# Altium PCB Connector_Board.PcbDoc
Units mil, origin at the board's own origin, x right, y up, seen from the top; angles counter-clockwise.
Board outline 2000 x 1100 mil, 2 copper layers (Top Layer, Bottom Layer), stack 63.2 mil thick; 6 components, 10 nets, 24 pads, 0 vias.
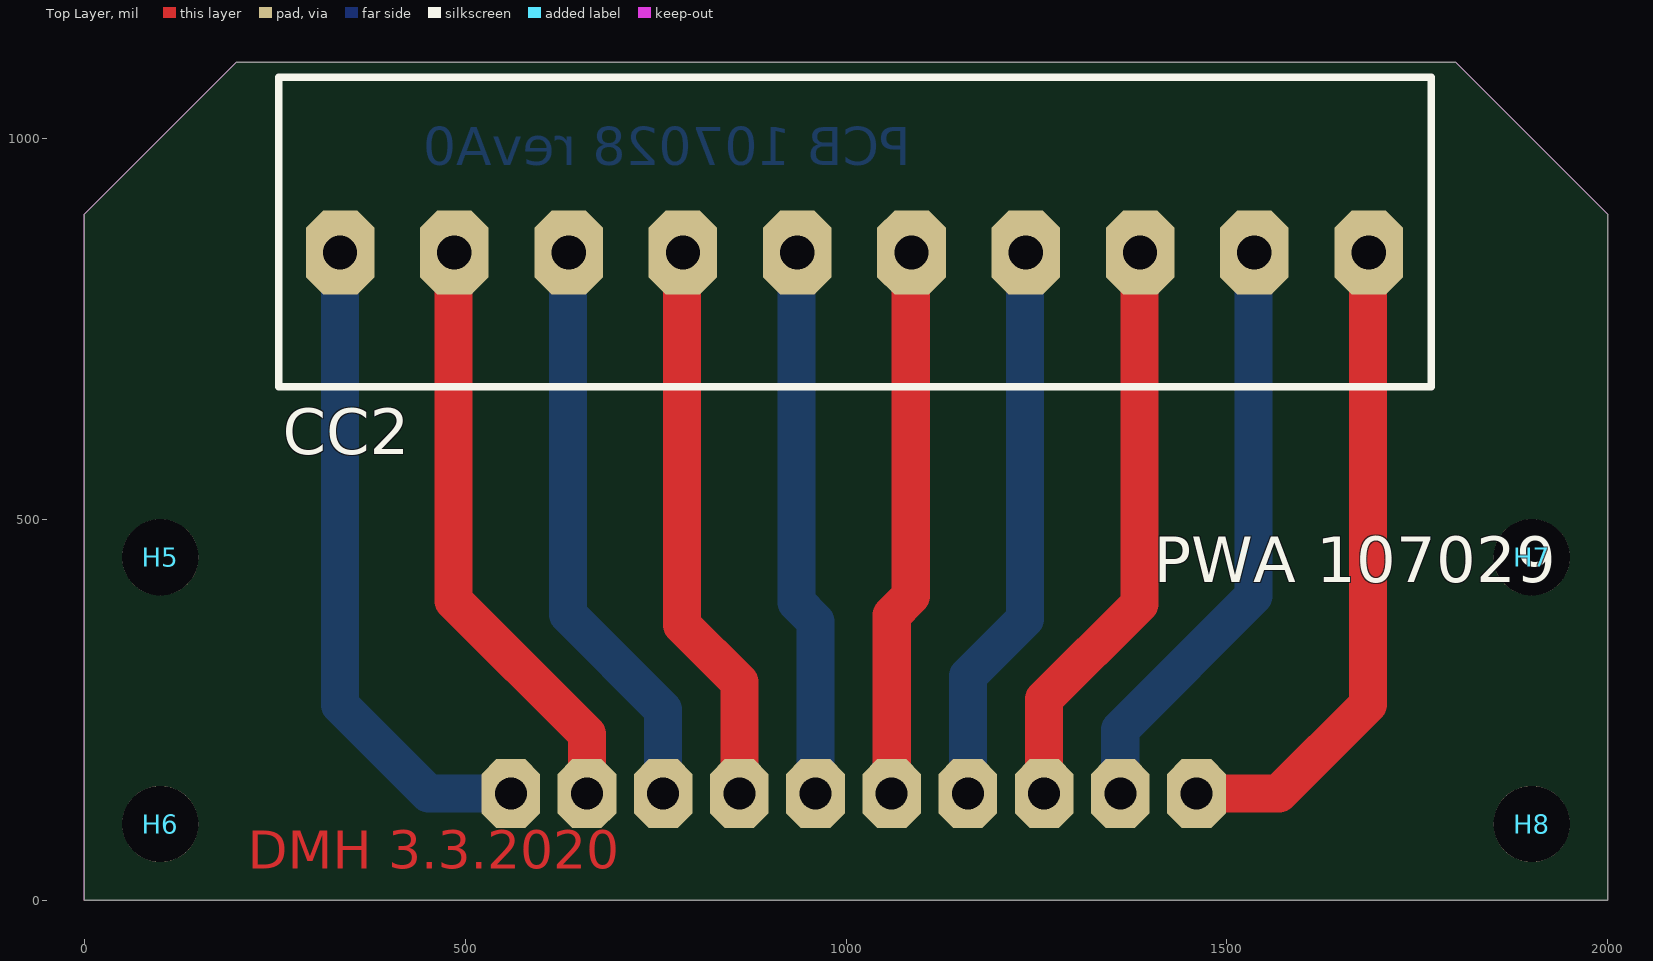
[diagram p0: Top Layer view]
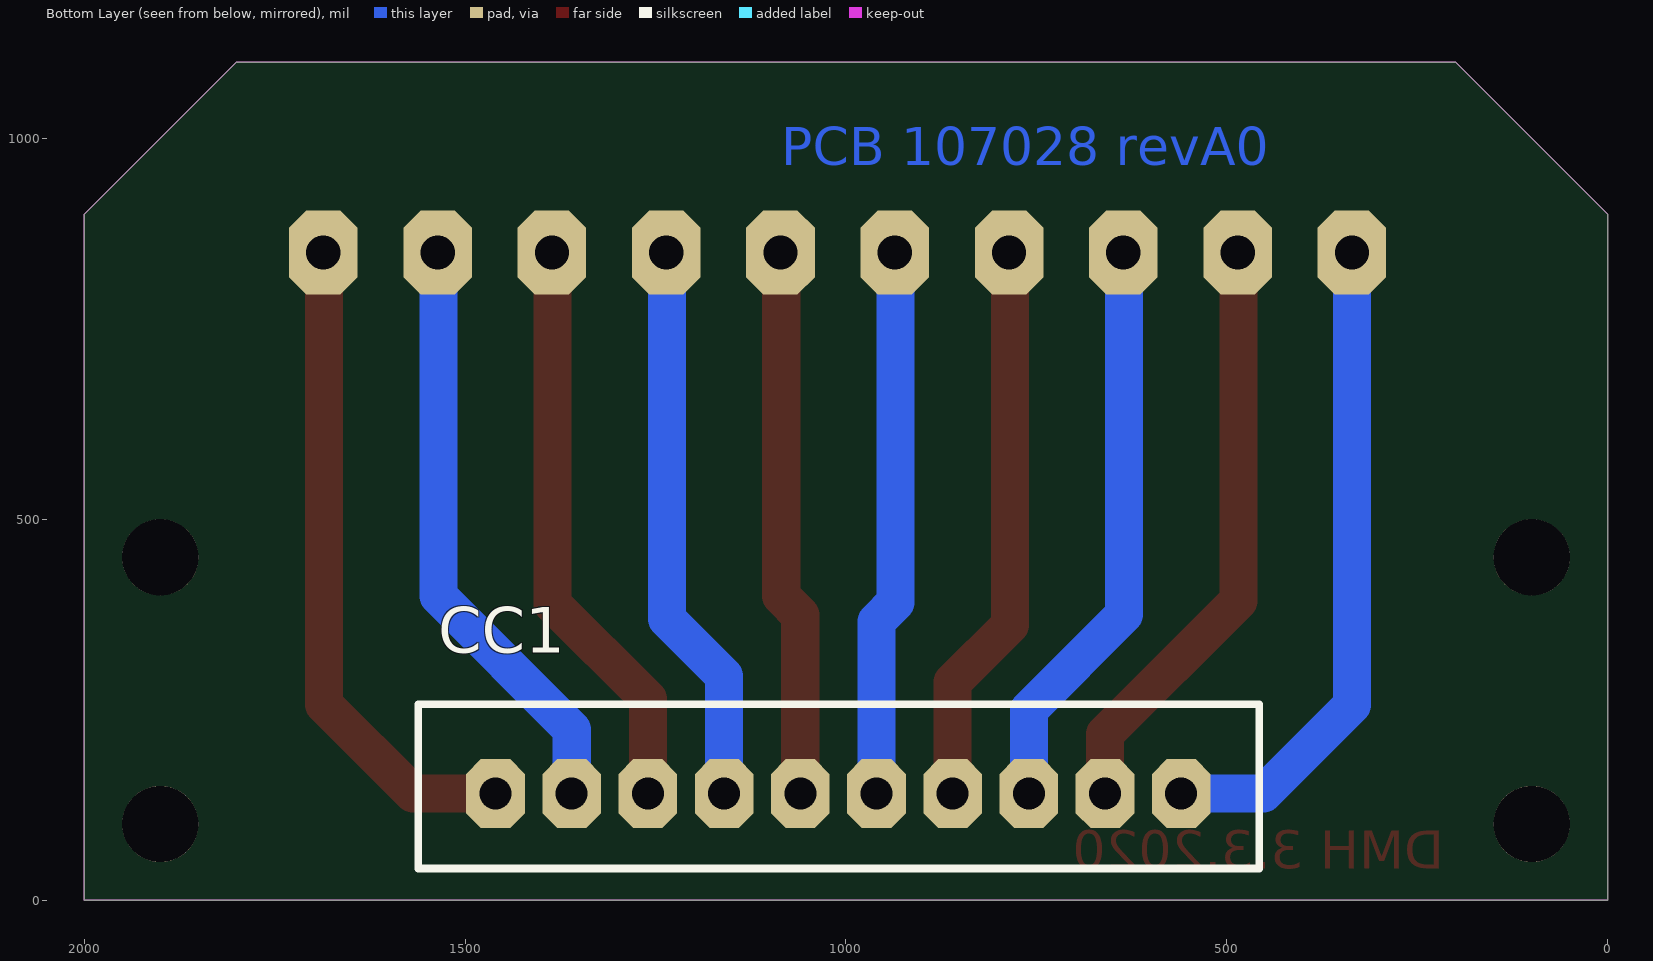
[diagram p1: Bottom Layer view, seen from below]

## Layer stack, top to bottom
Top Solder: solder mask 0.4, Solder Resist, Dk 3.5
Top Layer: signal copper 1.4
Dielectric 1: dielectric 60.4, FR-4, Dk 4.8
Bottom Layer: signal copper 1.4
Bottom Solder: solder mask 0.4, Solder Resist, Dk 3.5

## Board outline
0,0 0,900 200,1100 1800,1100 2000,900 2000,0

## Design rules (kind name [scope] priority, off if disabled: settings)
BoardOutlineClearance [All] p1: gap=12 ignorepadtopadclearanceinfootprint=FALSE
Clearance [All] p1: gap=10 ignorepadtopadclearanceinfootprint=FALSE except(0: Arc-Hole Track-Hole SMDPad-Hole THPad-Hole Via-Hole Fill-Hole Poly-Hole Region-Hole Text-Hole)
PolygonConnect [All] p1: connectstyle=Relief reliefconductorwidth=10 reliefentries=4 polygonreliefangle="90 Angle" airgapwidth=10
RoutingVias [All] p1: holewidth=28 width=50 viastyle="Through Hole" minholewidth=28 minwidth=50 maxholewidth=28 maxwidth=50
SolderMaskExpansion [All] p1: expansion=4 istentingtop=FALSE
Width [All] p1: maxlimit=50 minlimit=10 preferedwidth=20
30 further rules are at their usual default settings.

## Components (designator, comment, footprint, x,y, rotation, side; value= is the part's Value field where it differs from the comment)
CC1 "Molex 70543-0044" "10 PIN MOLEX VERTICAL" 1010,140 r180 bottom
CC2 "Phoenix 1728365" "PHOENIX 1728365" 1011,850 r180 top
H5 "Connector Board Mounting Hole" "Mount Hole Connector Board"#1 100,450 r0 top
H6 "Connector Board Mounting Hole" "Mount Hole Connector Board"#1 100,100 r0 top
H7 "Connector Board Mounting Hole" "Mount Hole Connector Board"#1 1900,450 r0 top
H8 "Connector Board Mounting Hole" "Mount Hole Connector Board"#2 2620,120 r0 top

## Footprints (in the part's own frame and the unit in brackets; to place one, negate y for a bottom-side part, rotate by r counter-clockwise, add the part's x,y. Pads: shape width x height; smd on the part's side, far side on the other; paste and mask are expansions set on the pad)
"10 PIN MOLEX VERTICAL" [mil] "Vertical Molex SL 10 Pin Connector"
  oct 77x90 hole 42: 1(450,0) 2(350,0) 3(250,0) 4(150,0) 5(50,0) 6(-50,0) 7(-150,0) 8(-250,0) 9(-350,0) 10(-450,0)
  silkscreen extent -551,-98 552,117, body extent -550,-97 550,163, height 467
"Mount Hole Connector Board"#1 [mil]
  round 100 hole 100 unplated: 0(0,0)
"Mount Hole Connector Board"#2 [mil]
  round 100 hole 100 unplated: 0(-720,-20)
"PHOENIX 1728365" [mil] "Phoenix PCB Connector, 1 x 10 pins"
  oct 90x110 hole 45: 1(-675,0) 2(-525,0) 3(-375,0) 4(-225,0) 5(-75,0) 6(75,0) 7(225,0) 8(375,0) 9(525,0) 10(675,0)
  silkscreen extent -757,-230 756,176, body extent -750,-224 750,169, height 374

## Part data
CC1: "Molex SL Vertical 1 x 10 header"
CC2: "Phoenix PCB Connector, 1 x 10 pins"

## Nets (pads, with @x,y where several pads share a name; then routed paths per layer and width w, separated by ;. In a path a pad name is that pad's centre, name@x,y a point inside that pad or via, vN(x,y) a via of type N, cw(c..) or ccw(c..) an arc to the next point about the centre after c; other vN are vias at no path point)
NetCC1_1: CC1.1 CC2.10 | length 866
  Bottom Layer w50: CC2.10 336,256 452,140 CC1.1
NetCC1_2: CC1.2 CC2.9 | length 782.5
  Top Layer w50: CC2.9@485,850 485,393 660,218 CC1.2
NetCC1_3: CC1.3 CC2.8 | length 761.8
  Bottom Layer w50: CC2.8@635,850 635,375 760,250 CC1.3
NetCC1_4: CC1.4 CC2.7 | length 741.1
  Top Layer w50: CC2.7@785,850 785,361 860,286 CC1.4
NetCC1_5: CC1.5 CC2.6 | length 720.4
  Bottom Layer w50: CC2.6@935,850 935,391 960,366 CC1.5
NetCC1_6: CC1.6 CC2.5 | length 720.4
  Top Layer w50: CC1.6 1060,374 1085,399 CC2.5@1085,850
NetCC1_7: CC1.7 CC2.4 | length 741.1
  Bottom Layer w50: CC1.7 1160,294 1235,369 CC2.4@1235,850
NetCC1_8: CC1.8 CC2.3 | length 761.8
  Top Layer w50: CC1.8 1260,264 1385,389 CC2.3@1385,850
NetCC1_9: CC1.9 CC2.2 | length 782.5
  Bottom Layer w50: CC1.9 1360,224 1535,399 CC2.2@1535,850
NetCC1_10: CC1.10 CC2.1 | length 866.5
  Top Layer w50: CC1.10 1568,140 1685,257 CC2.1@1685,850
pads on no net: H5.0 H6.0 H7.0 H8.0

## Keep-outs
Keep-Out Layer:
  the board outline again, w0.1

## Other copper
Top Layer:
  text "DMH 3.3.2020" at 215,25.09 h85
Bottom Layer:
  text "PCB 107028 revA0" at 1085,964.31 h50

## Silkscreen, mask and mechanical layers (free items; w line width, h text height)
Top Overlay:
  text "PWA 107029" at 1404.05,417.02 h60
Drill Drawing:
  lines w10: 0,0 2000,0 2000,900 1800,1100 200,1100 0,900 0,0
  lines w12: 2901.02,1774.14 3026.12,1774.14 2963.57,1649.04 2901.02,1774.14 ; 2901.02,1930.52 3026.12,1930.52 3026.12,2055.62 2901.02,2055.62 2901.02,1930.52 ; 2901.02,2243.28 2932.3,2243.28 2963.57,2212 2994.85,2243.28 3026.12,2243.28 2994.85,2274.55 3026.12,2305.83 2994.85,2305.83 2963.57,2337.1 2932.3,2305.83 2901.02,2305.83 2932.3,2274.55 2901.02,2243.28
  lines w15: 2790.93,1564.6 7958.49,1564.6 ; 2790.93,2409.04 7958.49,2409.04 ; 3803.02,1283.12 3803.02,2690.52 ; 4802.56,1283.12 4802.56,2690.52 ; 6946.41,1283.12 6946.41,2690.52 ; 2790.93,1283.12 7958.49,1283.12 7958.49,2690.52 2790.93,2690.52 2790.93,1283.12
  text "Symbol" at 2959.82,2493.48 h135.11
  text "Count" at 3887.46,2493.48 h135.11
  text "Hole Size" at 4887,2493.48 h135.11
  text "Plated" at 7030.85,2493.48 h135.11
  text "4" at 3887.46,2212 h112.59
  text "100.00mil (2.540mm)" at 4887,2212 h112.59
  text "NPTH" at 7030.85,2212 h112.59
  text "10" at 3887.46,1930.52 h112.59
  text "42.00mil (1.067mm)" at 4887,1930.52 h112.59
  text "PTH" at 7030.85,1930.52 h112.59
  text "10" at 3887.46,1649.04 h112.59
  text "45.00mil (1.143mm)" at 4887,1649.04 h112.59
  text "PTH" at 7030.85,1649.04 h112.59
  text "24 Total" at 3887.46,1367.56 h112.59
  text "DANIEL HAHAJ / DETEX CORP / 302 DETEX DR / NEW BRAUNFELS, TX 78130 / 830-629-2900" at 2780,283.09 h100
  text "BOARD SPECS: / LEAD-FREE HASL FINISH / FR-4 MATERIAL, 1.6MM THICKNESS / IOZ COOPER POURS, 2 SIDES / GREEN SOLDERMASK/WHITE SILKSCREEN, 2 SIDES" at 2790,-778.22 h100

## Dimensions
0,900 to 0,0 on Drill Drawing
200,1100 to 0,0 on Drill Drawing
0,915 to 1800,1100 on Drill Drawing
0,0 to 200,1100 on Drill Drawing
0,0 to 2000,0 on Drill Drawing